# Altium PCB 支架2.PcbDoc
Units mil, origin at the board's own origin, x right, y up, seen from the top; angles counter-clockwise.
Board outline 3303.32 x 808.4 mil, 2 copper layers (Top Layer, Bottom Layer); 7 components, 5 nets, 29 pads, 9 vias.
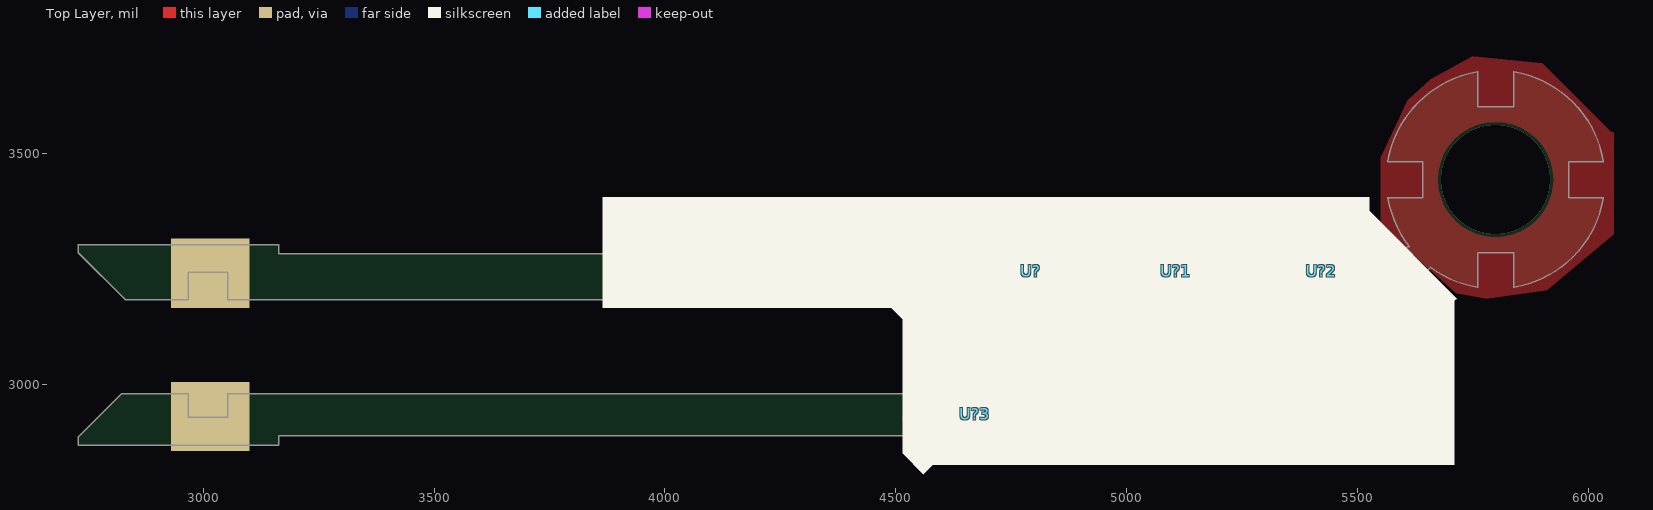
[diagram p0: Top Layer view]
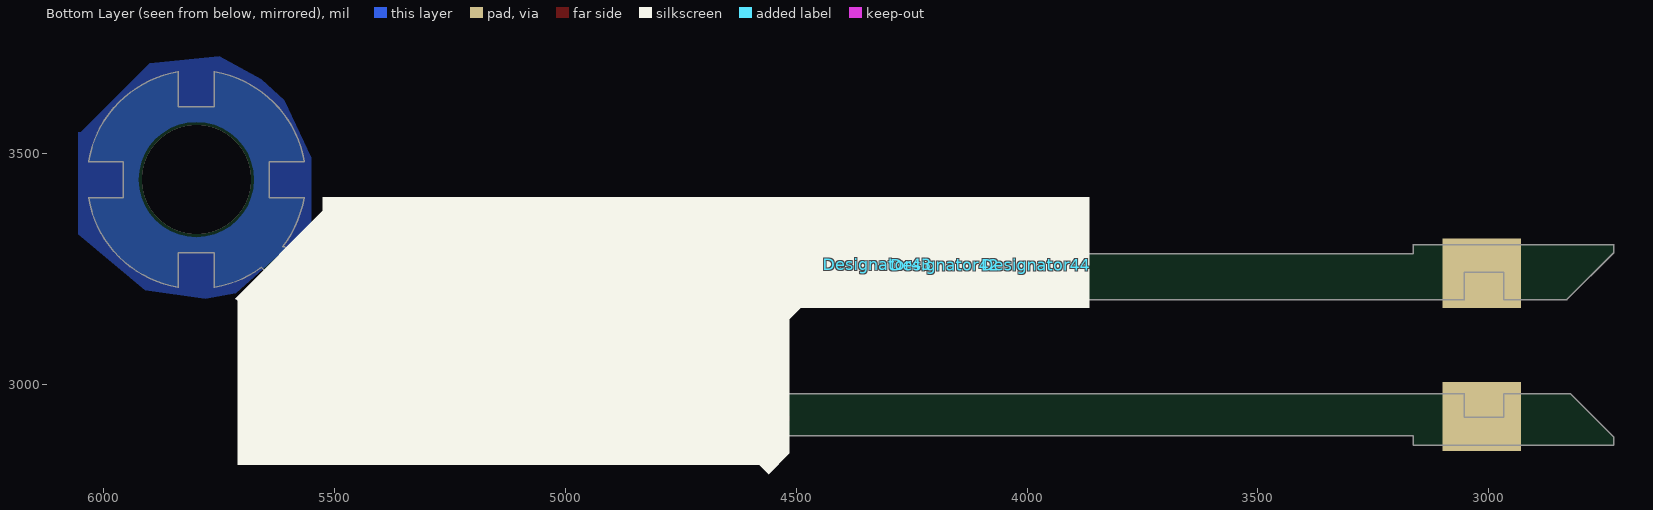
[diagram p1: Bottom Layer view, seen from below]
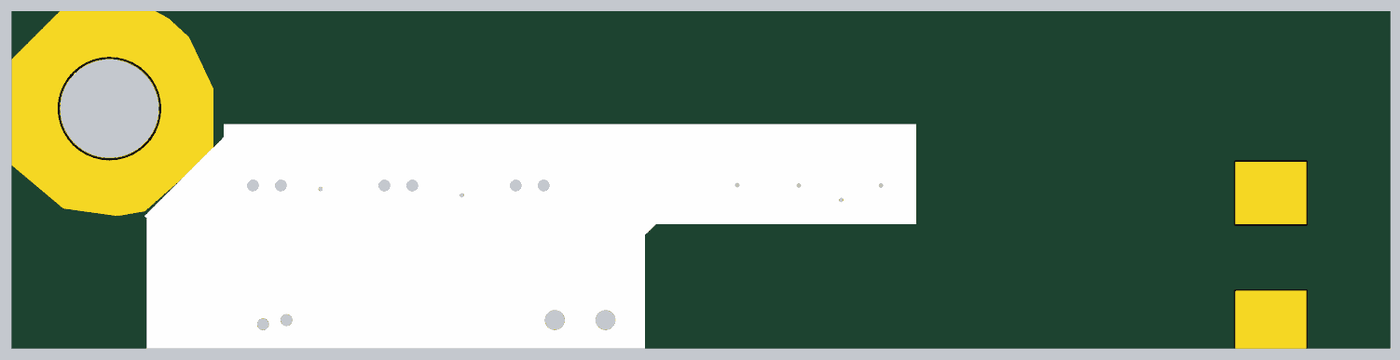
[diagram p2: 3D render of the assembled board from below, using the file's embedded part models]

## Layer stack, top to bottom
Top Solder: solder mask 0.4, Solder Resist, Dk 3.5
Top Layer: signal copper 1.4
Dielectric 1: dielectric 12.6, FR-4, Dk 4.8
Bottom Layer: signal copper 1.4
Bottom Solder: solder mask 0.4, Solder Resist, Dk 3.5

## Board outline
2730,2867.95 cw(c2730,2868.46) 2729.49,2868.46 2729.49,2885 cw(c2730,2885) 2729.64,2885.36 2823.34,2979.07 cw(c2823.7,2978.7) 2823.7,2979.22 2966.85,2979.22 cw(c2966.85,2978.7) 2967.37,2978.7 2967.37,2928.03 3052.95,2928.03 3052.95,2978.7 cw(c3053.46,2978.7) 3053.46,2979.22 5525.39,2979.22 5525.39,3182.91 3053.46,3182.91 cw(c3053.46,3183.43) 3052.95,3183.43 3052.95,3241.97 2967.37,3241.97 2967.37,3183.43 cw(c2966.85,3183.43) 2966.85,3182.91 2831.57,3182.91 cw(c2831.57,3183.43) 2831.21,3183.06 2729.64,3284.64 cw(c2730,3285) 2729.49,3285 2729.49,3301.54 cw(c2730,3301.54) 2730,3302.05 3163.07,3302.05 cw(c3163.07,3301.54) 3163.59,3301.54 3163.59,3282.37 5593.13,3282.37 5608.56,3297.79 cw(c5608.92,3297.43) 5608.92,3297.94 5612.22,3297.94 cw(c5799.37,3442.92) 5565.95,3403.46 cw(c5566.45,3403.55) 5566.45,3404.06 5641.37,3404.06 5641.37,3481.77 5566.45,3481.77 cw(c5566.45,3482.29) 5565.95,3482.37 cw(c5799.37,3442.92) 5759.91,3676.34 cw(c5760,3675.83) 5760.52,3675.83 5760.52,3600.91 5838.23,3600.91 5838.23,3675.83 cw(c5838.74,3675.83) 5838.83,3676.34 cw(c5799.37,3442.92) 6032.79,3482.37 cw(c6032.29,3482.29) 6032.8,3482.29 cw(c6032.29,3482.29) 6032.29,3481.77 cw(c6032.29,3482.29) 6032.29,3481.77 5957.37,3481.77 5957.37,3404.06 6032.29,3404.06 cw(c6032.29,3403.55) 6032.8,3403.55 cw(c6032.29,3403.55) 6032.79,3403.46 cw(c5799.37,3442.92) 5838.83,3209.49 cw(c5838.74,3210) 5838.23,3210 5838.23,3284.92 5760.52,3284.92 5760.52,3210 cw(c5760,3210) 5759.91,3209.49 cw(c5799.37,3442.92) 5658.32,3252.79 5644.53,3239 5644.53,3126.34 cw(c5644.02,3126.34) 5644.02,3125.82 5585.48,3125.82 5585.48,3044.18 5644.02,3044.18 cw(c5644.02,3043.66) 5644.53,3043.66 5644.53,2888.15 cw(c5644.02,2888.15) 5644.02,2887.63 3163.59,2887.63 3163.59,2868.46 cw(c3163.07,2868.46) 3163.07,2867.95

## Design rules (kind name [scope] priority, off if disabled: settings)
Clearance [All] p1: gap=6 ignorepadtopadclearanceinfootprint=FALSE except(0: Arc-Hole Track-Hole SMDPad-Hole THPad-Hole Via-Hole Fill-Hole Poly-Hole Region-Hole Text-Hole)
PolygonConnect PolygonConnect_1 [All vs IsNamedPolygon('Top Layer-gnd') Or  IsNamedPolygon('Bottom Layer-gnd')] p1: connectstyle=Direct reliefconductorwidth=10 reliefentries=4 polygonreliefangle="90 Angle" airgapwidth=10
PolygonConnect [All] p2: connectstyle=Relief reliefconductorwidth=10 reliefentries=4 polygonreliefangle="90 Angle" airgapwidth=10
RoutingVias [All] p1: holewidth=28 width=50 viastyle="Through Hole" minholewidth=28 minwidth=50 maxholewidth=28 maxwidth=50
SolderMaskExpansion [All] p1: expansion=4
Width [All] p1: maxlimit=100 minlimit=6 preferedwidth=6 minimp=50.000000 maximp=50.000000 favimp=50.000000
30 further rules are at their usual default settings.

## Components (designator, comment, footprint, x,y, rotation, side; value= is the part's Value field where it differs from the comment)
Designator42 "Comment" 0603_R#1 4177.01,3258.24 r0 bottom
Designator43 "Comment" 0603_R#2 4322.99,3259.78 r0 bottom
Designator44 "Comment" 0603_R#1 3980,3258.24 r0 bottom
U? "SW-SMD_TS-1086E-AC03526" SW-SMD_TS-1086E-AC03526-2 4792.03,3267.08 r0 top
U?1 "SW-SMD_TS-1086E-AC03526" SW-SMD_TS-1086E-AC03526-2 5107.03,3267.08 r0 top (schematic designator U?)
U?2 "SW-SMD_TS-1086E-AC03526" SW-SMD_TS-1086E-AC03526-2 5422.03,3267.08 r0 top (schematic designator U?)
U?3 "T12弹片" ? 4849.9,2935 r0 top (schematic designator U?)

## Footprints (in the part's own frame and the unit in brackets; to place one, negate y for a bottom-side part, rotate by r counter-clockwise, add the part's x,y. Pads: shape width x height; smd on the part's side, far side on the other; paste and mask are expansions set on the pad)
0603_R#1 [mm]
  rect 0.93x0.98 smd: 1(-0.77,0) 2(0.77,0)
  body extent -0.85,-0.4 0.85,0.4, height 0.56
0603_R#2 [mm]
  rect 0.93x0.98 smd: 2(0.77,0) vcc(-0.77,0)
  body extent -0.85,-0.4 0.85,0.4, height 0.56
SW-SMD_TS-1086E-AC03526-2 [mm]
  rect 0.9x0.597 smd: 1(-1.703,-1.524) 2(1.697,-1.524)
  rect 0.6x1.2 smd: 3(-2.303,0.375) 4(2.297,0.375)
  round 0.7 hole 0.7 unplated: ""(-0.853,-0.225) ""(0.847,-0.225)
  silkscreen extent -2.42,-1.62 2.41,1.9
? [mm]
  oval 2x1.7 hole 1.2: 1(-6.093,0)
  oval 2x1.7 hole 1.2 slot 1.205 at 0 deg: 1(-3.003,0)
  silkscreen extent -1.53,-0.54 6.97,0.63

## Free pads (board coordinates)
  rect 170x150 all layers, no hole: 2(3015,2930) 2(3015,3240)
  rect 120x230 smd: 2(5570,3055)

## Via types
v1: diameter 20, hole 10, Top Layer to Bottom Layer, 6 vias
v2: diameter 50, hole 28, Top Layer to Bottom Layer, 2 vias
v3: diameter 236.22, hole 236.22, Top Layer to Bottom Layer, 1 vias

## Nets (pads, with @x,y where several pads share a name; then routed paths per layer and width w, separated by ;. In a path a pad name is that pad's centre, name@x,y a point inside that pad or via, vN(x,y) a via of type N, cw(c..) or ccw(c..) an arc to the next point about the centre after c; other vN are vias at no path point)
b1: Designator44.2 U?.1 | length 2619.4
  Top Layer w10: v1(4045,3223.55) 4704.56,3223.55 U?.1@4725,3203.11
  Bottom Layer w6: v1(4045,3223.55) 4225.04,3223.55 4240,3208.59 4378.35,3208.59 4391.31,3221.55 4701.96,3221.55 4715.59,3207.92 4850.26,3207.92 4850.93,3208.59 5513.59,3208.59 5525,3220 5561.73,3220 5572.48,3209.25 5572.48,3176.39 5550,3153.91 5550,2935 5540,2925
  Bottom Layer w10: Designator44.2 v1(4045,3223.55)
  Bottom Layer w30: 5540,2895 5540,2925
b2: Designator42.2 U?1.1 | length 1877.6
  Top Layer w10: v1(4954.32,3234.66) 5008.45,3234.66 U?1.1@5040,3203.11
  Bottom Layer w6: Designator42.2@4221.61,3243.94 4243.9,3221.66 4374.46,3221.66 4386.34,3233.55 4706.93,3233.55 4720.56,3219.92 4845.29,3219.92 4858.92,3233.55 4954.32,3233.55 v1(4954.32,3234.66) 5025.34,3234.66 5036.54,3223.46 5298.76,3223.46 5299.09,3223.12 5501.42,3223.12 5515.47,3237.18 5572.48,3237.18 5586.4,3223.26 5586.4,3168.91 5565,3147.51 5565,2945 5585,2925
  Bottom Layer w10: Designator42.2 4207.32,3257.25 4220.63,3243.94 Designator42.2@4221.61,3243.94
  Bottom Layer w30: 5585,2890 5585,2925
b3: Designator43.2 U?2.1 | length 1770.2
  Top Layer w10: v1(5293.46,3250) 5293.46,3230.8 5321.16,3203.11 U?2.1@5355,3203.11
  Bottom Layer w6: Designator43.2@4367.6,3245.49 4369.8,3247.69 4709.77,3247.69 4725.53,3231.92 4840.32,3231.92 4863.4,3255 5025.49,3255 5045.03,3235.46 5252.77,3235.46 5267.31,3250 v1(5293.46,3250) 5306.54,3250 5321.41,3235.12 5483.48,3235.12 5498.88,3250.52 5586.4,3250.52 5605,3231.92 5605,3165.55 5579.46,3140.01 5579.46,2975.54 5630,2925
  Bottom Layer w10: Designator43.2 4353.31,3258.8 4366.61,3245.49 Designator43.2@4367.6,3245.49
  Bottom Layer w30: 5630,2895 5630,2925
gnd: U?1.2 U?1.3 U?1.4 U?2.2 U?2.3 U?2.4 U?.2 U?.3 U?.4
vcc: Designator42.1 Designator43.vcc Designator44.1 | length 2472.3
  Top Layer w10: v1(3949.69,3258.24) 3950.57,3259.12 4146.69,3259.12 v1(4294.12,3259.12) 4293.24,3258.24 v1(4146.69,3258.24)
  Bottom Layer w6: v1(3949.69,3258.24) 3949.69,3240.31 3985,3205 4036.68,3205 4037.13,3204.55 4052.87,3204.55 4053.32,3205 4226.62,3205 4235.03,3196.59 4383.32,3196.59 4396.28,3209.55 4696.99,3209.55 4710.62,3195.92 4855.23,3195.92 4855.9,3196.59 5521.59,3196.59 5530,3205 5545,3205 5550,3200 5550,3176.97 5535,3161.97 5535,2963.41 5498.88,2927.29
  Bottom Layer w30: 5498.88,2895 5498.88,2927.29
pads on no net: U?1. U?2. U?3.1 U?.
copper on no net: | length 2106
  Top Layer w10: 4625,2910 4640,2925 ; 5570,3055 5615,3010 5615,2915.86 5605.86,2925
  Top Layer w80: 4555,2925 4640,2925 5605.86,2925
  Bottom Layer w80: 4567.89,2925 v2(5431.14,2925)
  other v2: 5375,2935
  other v3: 5799.37,3442.92

## Polygon pours and split planes (outlines as drawn)
gnd on Top Layer "Top Layer-gnd" (solid, pour order 0): 3875,3281.85 3875,3203.11 5645,3203.11 5645,3235 5641.85,3235 5595,3281.85
no net on Top Layer "Top Layer-No Net" (solid, pour order 8): 5750,3710 5658.27,3660 5608.92,3615 5550,3490 5550,3345 5575,3320 5714.19,3196.51 5780,3185 5910,3203.11 6055,3325 6055,3545 6050,3545 5900,3695
gnd on Bottom Layer "Bottom Layer-gnd" (solid, pour order 2): 3875,3281.85 3875,3203.11 5645,3203.11 5645,3235 5641.85,3235 5595,3281.85
no net on Bottom Layer "Bottom Layer-No Net" (solid, pour order 6): 5750,3710 5658.27,3660 5608.92,3615 5550,3490 5550,3345 5575,3320 5714.19,3196.51 5780,3185 5910,3203.11 6055,3325 6055,3545 6050,3545 5900,3695
no net on Top Solder (solid, pour order 4): 5750,3710 5658.27,3660 5608.92,3615 5550,3490 5550,3345 5575,3320 5714.19,3196.51 5780,3185 5910,3203.11 6055,3325 6055,3545 6050,3545 5900,3695
no net on Bottom Solder (solid, pour order 10): 5750,3710 5658.27,3660 5608.92,3615 5550,3490 5550,3345 5575,3320 5714.19,3196.51 5780,3185 5910,3203.11 6055,3325 6055,3545 6050,3545 5900,3695
no net on Top Overlay (solid): 3865,3405 5525,3405 5525,3375 5715,3185 5710,3180 5710,2825 4580,2825 4560,2805 4515,2850 4515,3140 4490,3165 3865,3165
no net on Bottom Overlay (solid): 3865,3405 5525,3405 5525,3375 5715,3185 5710,3180 5710,2825 4580,2825 4560,2805 4515,2850 4515,3140 4490,3165 3865,3165

## Silkscreen, mask and mechanical layers (free items; w line width, h text height)
Bottom Solder:
  lines w30: 5498.88,2895 5498.88,2927.29 ; 5540,2895 5540,2925 ; 5585,2890 5585,2925 ; 5630,2895 5630,2925
Mechanical 2:
  circle w1: c5799.37,3442.92 r118.11
  lines w1: 3053.46,3203.11 3053.46,3242.48 ; 3053.46,3242.48 3053.46,3183.43 5525.91,3183.43 5525.91,2978.7 3053.46,2978.7 3053.46,2927.52 2966.85,2927.52 2966.85,2978.7 2823.7,2978.7 2730,2885 2730,2868.46 3163.07,2868.46 3163.07,2888.15 5644.02,2888.15 5644.02,3043.66 5584.96,3043.66 5584.96,3126.34 5644.02,3126.34 5644.02,3234.32 5644.02,3239.21 5658.27,3253.47 ccw(c5799.37,3442.92) 5760,3210 5760,3285.44 5838.74,3285.44 5838.74,3210 ccw(c5799.37,3442.92) 6032.29,3403.55 5956.85,3403.55 5956.85,3482.29 6032.29,3482.29 ccw(c5799.37,3442.92) 5838.74,3675.83 5838.74,3600.4 5760,3600.4 5760,3675.83 ccw(c5799.37,3442.92) 5566.45,3482.29 5641.89,3482.29 5641.89,3403.55 5566.45,3403.55 ccw(c5799.37,3442.92) 5613.27,3297.43 5608.92,3297.43 5593.35,3281.85 5515.34,3281.85 5330.3,3281.85 5200.38,3281.85 5015.34,3281.85 4885.42,3281.85 4700.38,3281.85 3163.07,3281.85 3163.07,3301.54 2730,3301.54 2730,3285 2831.57,3183.43 2966.85,3183.43 2966.85,3242.48 3053.46,3242.48